# Altium PCB WallDigitalClock.PcbDoc
Units mm, origin at the board's own origin, x right, y up, seen from the top; angles counter-clockwise.
Board outline 214 x 90 mm, 2 copper layers (Top Layer, Bottom Layer); 68 components, 59 nets, 243 pads, 27 vias.
Unrouted connection lines stored in the file: 71.
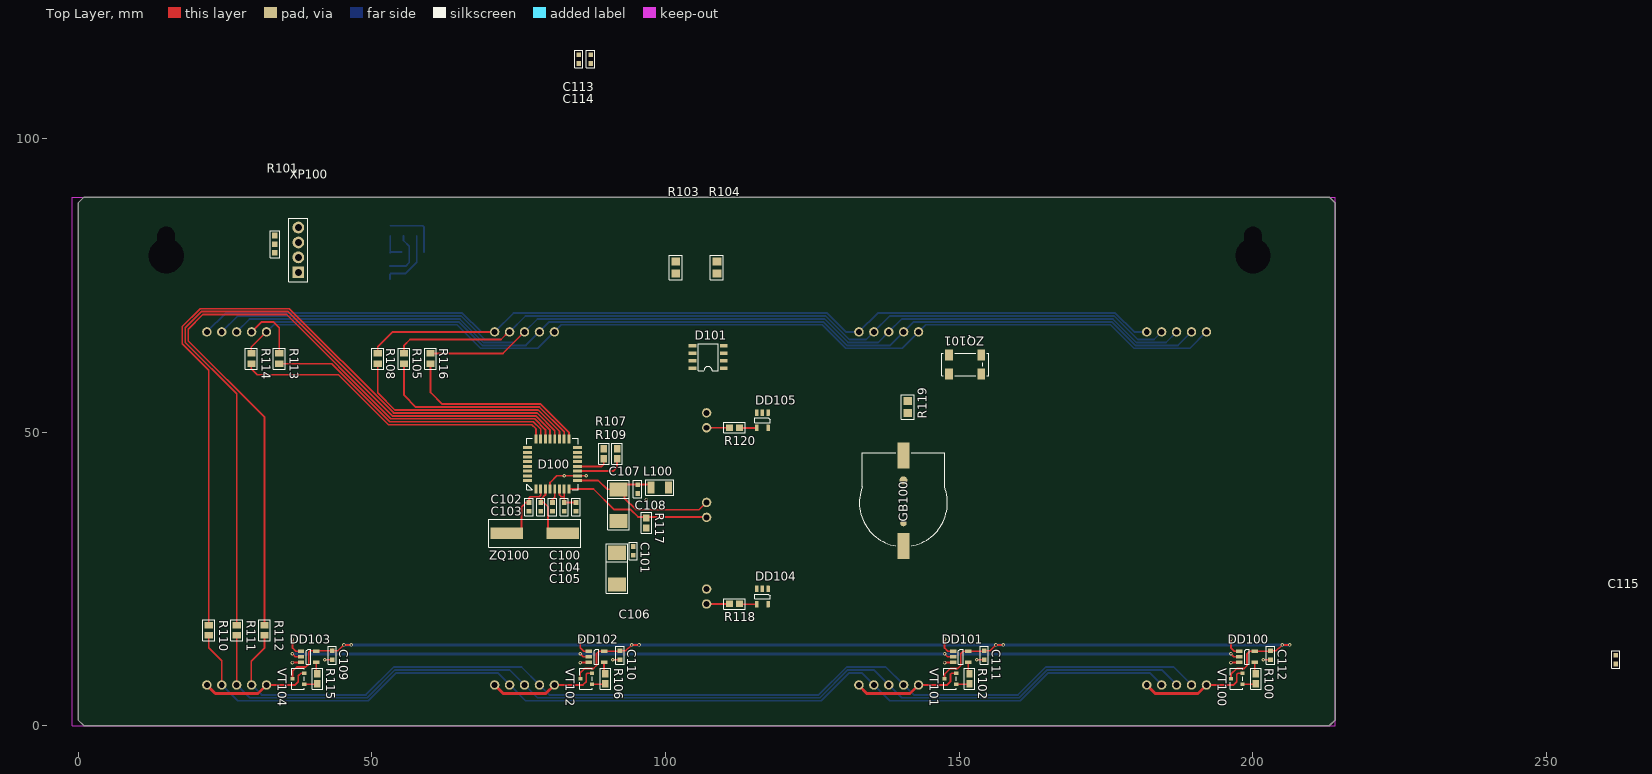
[diagram p0: Top Layer view]
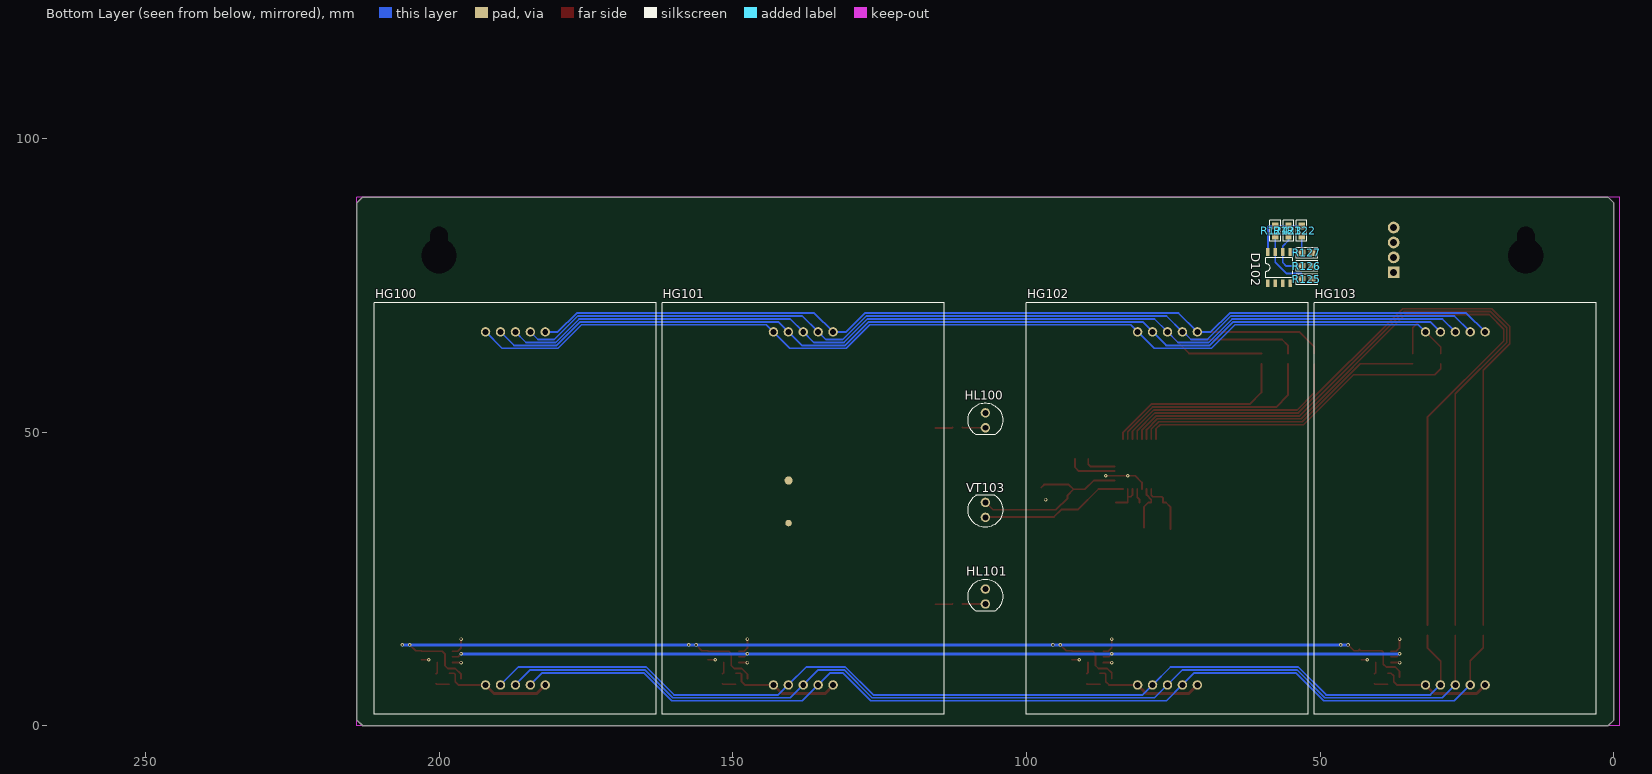
[diagram p1: Bottom Layer view, seen from below]

## Layer stack, top to bottom
Top Solder: solder mask 0.0102, Solder Resist, Dk 3.5
Top Layer: signal copper 0.0356
Dielectric 1: dielectric 0.32, FR-4, Dk 4.8
Bottom Layer: signal copper 0.0356
Bottom Solder: solder mask 0.0102, Solder Resist, Dk 3.5

## Board outline
1,0 213,0 214,1 214,89 213,90 1,90 0,89 0,1

## Design rules (kind name [scope] priority, off if disabled: settings)
Clearance [All] p1: gap=0.2 ignorepadtopadclearanceinfootprint=TRUE
PolygonConnect [All] p1: connectstyle=Relief reliefconductorwidth=0.254 reliefentries=4 polygonreliefangle="90 Angle" airgapwidth=0.254
RoutingVias [All] p1: holewidth=0.3 width=0.6 viastyle="Through Hole" minholewidth=0.3 minwidth=0.6 maxholewidth=0.4 maxwidth=0.8
SolderMaskExpansion [All] p1: expansion=0.102
Width [All] p1: maxlimit=0.8 minlimit=0.2 preferedwidth=0.5
30 further rules are at their usual default settings.

## Components (designator, comment, footprint, x,y, rotation, side; value= is the part's Value field where it differs from the comment)
C100 "Capacitor" CAP0603RS 80.75,37.25 r270 top value=1uF
C101 "Capacitor" CAP0603RS 94.5,29.75 r270 top value=0.1uF
C102 "Capacitor" CAP0603RS 78.75,37.25 r270 top value=12pF
C103 "Capacitor" CAP0603RS 76.75,37.25 r270 top value=12pF
C104 "Capacitor" CAP0603RS 82.75,37.25 r270 top value=0.1uF
C105 "Capacitor" CAP0603RS 84.75,37.25 r270 top value=0.1uF
C106 "Capacitor_Pol" Type-C 91.75,26.75 r270 top value=10uFx10V
C107 "Capacitor_Pol" Type-C 92,37.55 r270 top value=10uFx10V
C108 "Capacitor" CAP0603RS 95.25,40.3 r270 top locked value=0.1uF
C109 "Capacitor" CAP0603RS 43.25,12 r270 top value=0.1uF
C110 "Capacitor" CAP0603RS 92.25,12 r270 top value=0.1uF
C111 "Capacitor" CAP0603RS 154.25,12 r270 top value=0.1uF
C112 "Capacitor" CAP0603RS 203,12 r270 top value=0.1uF
C113 "Capacitor" CAP0603RS 85.25,113.5 r270 top value=0.1uF
C114 "Capacitor" CAP0603RS 87.25,113.5 r270 top value=0.1uF
C115 "Capacitor" CAP0603RS 261.75,11.25 r90 top value=0.1uF
D100 "STM8S105K4T6C" LQFP32 80.75,44.55 r90 top
D101 "DS1307" SO8 107.25,62.75 r180 top
D102 "LM75A" SO8 57,78 r90 bottom
DD100 "SN74LVC1G08" SOT23-5 199,11.75 r0 top value=SN74LVC1G08DVBR
DD101 "SN74LVC1G08" SOT23-5 150.25,11.75 r0 top value=SN74LVC1G08DVBR
DD102 "SN74LVC1G08" SOT23-5 88.25,11.75 r0 top value=SN74LVC1G08DVBR
DD103 "SN74LVC1G08" SOT23-5 39.25,11.75 r0 top value=SN74LVC1G08DVBR
DD104 "SN74LVC1G08" SOT23-5 116.5,22 r270 top value=SN74LVC1G08DVBR
DD105 "SN74LVC1G08" SOT23-5 116.5,52 r270 top value=SN74LVC1G08DVBR
GB100 "*" CR1220_HOLDER 140.5,38 r90 top value=CR1220
HG100 "SA23-11" SA23-11 187,37 r180 bottom locked value=SA23-11GWA (schematic designator HG1)
HG101 "SA23-11" SA23-11 138,37 r180 bottom locked value=SA23-11GWA (schematic designator HG2)
HG102 "SA23-11" SA23-11 76,37 r180 bottom locked value=SA23-11GWA (schematic designator HG3)
HG103 "SA23-11" SA23-11 27,37 r180 bottom locked value=SA23-11GWA (schematic designator HG4)
HL100 "Green" LED_5mm_Green 107,52 r270 bottom locked value=L-1503GT (schematic designator HL1)
HL101 "Green" LED_5mm_Green 107,22 r270 bottom locked value=L-1503GT (schematic designator HL2)
L100 "Inductor" IND1210 99,40.55 r180 top value=CM322522-100KL
R100 "Resistor" RES0603WS 200.5,8 r270 top value=1k
R101 "Res_JMP" RES0603JMP-RS 33.5,82 r90 top value=10k
R102 "Resistor" RES0603WS 151.75,8 r270 top value=1k
R103 "Resistor" RES0805WS 101.75,78 r90 top value=4.7k
R104 "Resistor" RES0805WS 108.75,78 r90 top value=4.7k
R105 "Resistor" RES0805RS 55.5,62.5 r90 top value=10
R106 "Resistor" RES0603WS 89.75,8 r270 top value=1k
R107 "Resistor" RES0603WS 91.75,46.3 r270 top value=100
R108 "Resistor" RES0805RS 51,62.5 r90 top value=10
R109 "Resistor" RES0603WS 89.5,46.3 r270 top value=100
R110 "Resistor" RES0805RS 22.25,16.25 r270 top value=10
R111 "Resistor" RES0805RS 27,16.25 r270 top value=10
R112 "Resistor" RES0805RS 31.75,16.25 r270 top value=10
R113 "Resistor" RES0805RS 34.25,62.5 r90 top value=10
R114 "Resistor" RES0805RS 29.5,62.5 r90 top value=10
R115 "Resistor" RES0603WS 40.75,8 r270 top value=1k
R116 "Resistor" RES0805RS 60,62.5 r90 top value=10
R117 "Resistor" RES0603WS 96.75,34.55 r270 top value=10k
R118 "Resistor" RES0603WS 111.75,20.75 r180 top value=10
R119 "Resistor" RES0805WS 141.25,54.25 r270 top value=10k
R120 "Resistor" RES0603WS 111.75,50.75 r180 top value=10
R122 "Resistor" RES0603WS 53.15,84.25 r270 bottom value=10k
R123 "Resistor" RES0603WS 55.4,84.25 r270 bottom value=10k
R124 "Resistor" RES0603WS 57.65,84.25 r270 bottom value=10k
R125 "Resistor" RES0603WS 52.25,76 r180 bottom value=0
R126 "Resistor" RES0603WS 52.25,78.25 r180 bottom value=0
R127 "Resistor" RES0603WS 52.25,80.5 r180 bottom value=0
VT100 "NPN" SOT-23 197.25,8 r90 top value=BC817-25.215
VT101 "NPN" SOT-23 148.5,8 r90 top value=BC817-25.215
VT102 "NPN" SOT-23 86.5,8 r90 top value=BC817-25.215
VT103 "Photo_Transistor" LED_5mm_Clear 107,36.75 r90 bottom locked value=BPW85B
VT104 "NPN" SOT-23 37.5,8 r90 top value=BC817-25.215
XP100 "MaleConn_4_pin" PLS-4-2.54 37.5,81 r90 top value=PLS-4
ZQ100 "*" HC-49SM 77.75,32.75 r180 top value=12MHz
ZQ101 "*" KX-327S 151,61.5 r180 top value=32.768kHz

## Footprints (in the part's own frame and the unit in brackets; to place one, negate y for a bottom-side part, rotate by r counter-clockwise, add the part's x,y. Pads: shape width x height; smd on the part's side, far side on the other; paste and mask are expansions set on the pad)
CAP0603RS [mm] "0603 Capacitor footprint"
  rect 0.8x0.8 smd: 1(-0.75,0) 2(0.75,0)
  silkscreen extent -1.5,-0.7 1.5,0.7, body extent -0.8,-0.4 0.8,0.4, height 0.6
CR1220_HOLDER [mm]
  rect 4.4x2 smd mask+0.102: 1(8,0) 2(-7.4,0)
  round 1.1 all layers, no hole mask+0: 4(-3.5,0)
  round 1.4 all layers, no hole mask+0: 5(3.75,0)
  silkscreen extent -7.39,-7.5 8.5,7.5, body extent -9.1,-7.4 9.7,7.35, height 4.28
HC-49SM [mm] "HC-49/SM Package"
  rect 5.5x2 smd: 1(-4.75,0) 2(4.75,0)
  silkscreen extent -7.8,-2.4 7.8,2.4, body extent -6.4,-2.41 6.4,2.42, height 4.35
IND1210 [mm] "1210 CM322522 Package"
  rect 1.2x2 smd: 1(-1.5,0) 2(1.5,0)
  silkscreen extent -2.4,-1.3 2.4,1.3, body extent -1.68,-1.25 1.68,1.25, height 2.3
KX-327S [mm] "KX-327, 4 pin"
  rect 1.3x1.9 smd: 1(-2.75,-1.6) 2(2.75,-1.6) 3(2.75,1.6) 4(-2.75,1.6)
  silkscreen extent -4,-1.9 4,1.9, body extent -4,-1.85 4,1.85, height 2.55
LED_5mm_Clear [mm] "Single LED, Pinch 2.54mm, Size 5mm"
  round 1.6 hole 1: 1(-1.27,0) 2(1.27,0)
  silkscreen extent -2.95,-2.95 2.5,2.95, body extent -2.98,-3.01 2.44,3.01, height 12.31
LED_5mm_Green [mm] "Single LED, Pinch 2.54mm, Size 5mm"
  round 1.6 hole 1: 1(-1.27,0) 2(1.27,0)
  silkscreen extent -2.95,-2.95 2.5,2.95, body extent -2.98,-3.01 2.44,3.01, height 12.31
LQFP32 [mm] "LQFP32 Package, Pitch 0.8mm, 32 Lead"
  rect 1.5x0.5 smd: 1(-4.25,2.8) 2(-4.25,2) 3(-4.25,1.2) 4(-4.25,0.4) 5(-4.25,-0.4) 6(-4.25,-1.2) 7(-4.25,-2) 8(-4.25,-2.8) 17(4.25,-2.8) 18(4.25,-2) 19(4.25,-1.2) 20(4.25,-0.4) 21(4.25,0.4) 22(4.25,1.2) 23(4.25,2) 24(4.25,2.8)
  rect 0.5x1.5 smd: 9(-2.8,-4.25) 10(-2,-4.25) 11(-1.2,-4.25) 12(-0.4,-4.25) 13(0.4,-4.25) 14(1.2,-4.25) 15(2,-4.25) 16(2.8,-4.25) 25(2.8,4.25) 26(2,4.25) 27(1.2,4.25) 28(0.4,4.25) 29(-0.4,4.25) 30(-1.2,4.25) 31(-2,4.25) 32(-2.8,4.25)
  silkscreen extent -4.4,-4.4 4.4,4.4, body extent -4.5,-4.5 4.5,4.5, height 1.68
PLS-4-2.54 [mm] "PLS Connector, 4 pin, Pitch 2.54mm (0.1inch)"
  rect 2x2 hole 1.2: 1(-3.81,0)
  round 2 hole 1.2: 2(-1.27,0) 3(1.27,0) 4(3.81,0)
  silkscreen extent -5.4,-1.6 5.4,1.6, body extent -5.08,-1.27 5.08,1.27, height 8.59
RES0603JMP-RS [mm] "Resistor Jumper, 0603 Package, Reflow Soldering"
  rect 0.95x0.95 smd: 1(-1.45,0) 2(0,0) 3(1.45,0)
  silkscreen extent -2.3,-0.8 2.3,0.8, body extent -1.52,-0.43 0.08,0.43, height 0.48
RES0603WS [mm] "Resistor 0603 Wave Soldering"
  rect 1.2x1.1 smd: 1(-0.85,0) 2(0.85,0)
  silkscreen extent -1.8,-0.9 1.8,0.9, body extent -0.8,-0.43 0.8,0.43, height 0.48
RES0805RS [mm] "Resistor 0805 Reflow Soldering"
  rect 1.1x1.4 smd: 1(-0.875,0) 2(0.875,0)
  silkscreen extent -1.8,-1 1.8,1, body extent -1,-0.63 1,0.63, height 0.48
RES0805WS [mm] "Resistor 0805 Wave Soldering"
  rect 1.4x1.5 smd: 1(-1.025,0) 2(1.025,0)
  silkscreen extent -2.1,-1.1 2.1,1.1, body extent -1,-0.63 1,0.63, height 0.48
SA23-11 [mm] "7-Segment Display, 57mm (2.3 inch)"
  round 1.6 hole 1: 1(-5.08,-30.05) 2(-2.54,-30.05) 3(0,-30.05) 4(2.54,-30.05) 5(5.08,-30.05) 6(5.08,30.05) 7(2.54,30.05) 8(0,30.05) 9(-2.54,30.05) 10(-5.08,30.05)
  silkscreen extent -24,-35 24,35, body extent -24,-35 24,35, height 12
SO8 [mm] "SOT96-1 Package, 8 pin, Pitch 1.27mm"
  rect 1.3x0.6 smd: 1(-2.65,1.905) 2(-2.65,0.635) 3(-2.65,-0.635) 4(-2.65,-1.905) 5(2.65,-1.905) 6(2.65,-0.635) 7(2.65,0.635) 8(2.65,1.905)
  silkscreen extent -1.7,-2.3 1.7,2.3, body extent -2.9,-2.45 2.88,2.45, height 1.45
SOT23-5 [mm] "SOT23, 5 pins"
  rrect15% 1.1x0.6 smd: 1(-1.3,0.95) 2(-1.3,0) 3(-1.3,-0.95) 4(1.3,-0.95) 5(1.3,0.95)
  silkscreen extent -0.4,-1.3 0.4,1.3, body extent -1.4,-1.45 1.4,1.45, height 1.46
SOT-23 [mm]
  rect 0.6x0.7 smd: 1(-0.95,-1) 2(0.95,-1) 3(0,1)
  silkscreen extent -1.8,-1 1.8,1.1, body extent -1.5,-1.25 1.5,1.25, height 1.15
Type-C [mm] "6032-28 (Type-C) Package, Tantalum Capacitor"
  rect 2.4x3 smd: 1(-2.7,0) 2(2.7,0)
  silkscreen extent -4.2,-1.8 4.2,1.8, body extent -3.15,-1.75 3.15,1.75, height 2.85

## Part data
C106 C107 VT103: Manufacturer=Vishay
  C106 C107: HelpURL=https://www.vishay.com/docs/40002/293d.pdf
  VT103: HelpURL=https://static.chipdip.ru/lib/052/DOC000052462.pdf
D100: "MCU 8bit, STM8 CISC, Package LQFP-32", Manufacturer="ST Microelectronics", HelpURL=https://www.st.com/resource/en/datasheet/stm8s105k4.pdf
D101: "Real-time clock (RTC)", HelpURL=https://static.chipdip.ru/lib/041/DOC000041914.pdf
D102: "Digital temperature sensor and thermal watchdog", HelpURL=https://static.chipdip.ru/lib/301/DOC000301694.pdf
DD100 DD101 DD102 DD103 DD104 DD105: "Single 2-Input Positive-AND Gate", Manufacturer="Texas Instruments", HelpURL=http://www.ti.com/lit/ds/symlink/sn74lvc1g08.pdf
GB100: library part Single_Battety, "Holder for single battery"
HG100 HG101 HG102 HG103: "Single Digit Numeric Display 57mm (2.3INCH), Common Anode", Manufacturer=Kingbright, HelpURL=https://www.chipdip.ru/product/sa23-11gwa?from=visited_product
HL100 HL101: library part LED
L100: Manufacturer=Bourns, HelpURL=https://www.bourns.com/docs/Product-Datasheets/cm322522.pdf
R101: "Jumper two way on resistor"
ZQ100 ZQ101: library part Crystal_Oscillator

## Free pads (board coordinates)
  round 0 hole 6 unplated: 0(15,80) 0(200,80)
  round 0 hole 3 slot 6 at 90 deg unplated: 0(15,82) 0(200,82)

## Via types
v1: diameter 0.6, hole 0.3, Top Layer to Bottom Layer, 27 vias

## Nets (pads, with @x,y where several pads share a name; then routed paths per layer and width w, separated by ;. In a path a pad name is that pad's centre, name@x,y a point inside that pad or via, vN(x,y) a via of type N, cw(c..) or ccw(c..) an arc to the next point about the centre after c; other vN are vias at no path point)
DIG.1: HG100.1 HG100.5 VT100.2 | length 19.1
  Top Layer w0.3: HG100.1 196.7,6.95 197.25,7.5 197.25,8.75 197.45,8.95 VT100.2
  Top Layer w0.5: HG100.5 183.37,5.5 190.63,5.5 HG100.1
DIG.2: HG101.1 HG101.5 VT101.2 | length 19.4
  Top Layer w0.3: HG101.1 147.95,6.95 148.5,7.5 148.5,8.75 148.7,8.95 VT101.2
  Top Layer w0.5: HG101.5 132.92,6.83 134.25,5.5 141.63,5.5 HG101.1
DIG.3: HG102.1 HG102.5 VT102.2 | length 19.3
  Top Layer w0.3: HG102.1 85.95,6.95 86.5,7.5 86.5,8.75 86.7,8.95 VT102.2
  Top Layer w0.5: HG102.5 72.37,5.5 79.63,5.5 HG102.1
DIG.4: HG103.1 HG103.5 VT104.2 | length 19.2
  Top Layer w0.3: HG103.1 36.95,6.95 37.5,7.5 37.5,8.5 37.95,8.95 VT104.2
  Top Layer w0.5: HG103.5 23.37,5.5 30.63,5.5 HG103.1
DIGIN.1: D100.16 DD100.1 | length 3.2
  Top Layer w0.3: v1(196.25,14.75) 196.25,13.25 196.8,12.7 DD100.1
DIGIN.2: D100.15 DD101.1 | length 3.2
  Top Layer w0.3: v1(147.5,14.75) 147.5,13.25 148.05,12.7 DD101.1
DIGIN.3: D100.14 DD102.1 | length 3.2
  Top Layer w0.3: v1(85.5,14.75) 85.5,13.25 86.05,12.7 DD102.1
DIGIN.4: D100.13 DD103.1 | length 3.2
  Top Layer w0.3: v1(36.5,14.75) 36.5,13.25 37.05,12.7 DD103.1
DOT.A: HL101.2 R118.2 | length 3.9
  Top Layer w0.3: HL101.2 110.88,20.73 R118.2
DOT.B: HL100.2 R120.2 | length 3.9
  Top Layer w0.3: HL100.2 110.88,50.73 R120.2
DOTIN.A: DD104.1
DOTIN.B: DD105.1
DP: HG100.8 HG101.8 HG102.8 HG103.8 R116.2 | length 187.5
  Top Layer w0.3: R116.2 72.325,63.375 HG102.8
  Bottom Layer w0.3: HG103.8 29.2,69.25 65,69.25 69,65.25 74.2,65.25 HG102.8 78.2,69.25 127.086,69.25 131.086,65.25 136.2,65.25 HG101.8 140.2,69.25 176.164,69.25 180.164,65.25 185.2,65.25 HG100.8
GND: C100.2 C101.2 C102.2 C103.2 C104.2 C105.2 C106.2 C107.2 C108.2 C109.2 C110.2 C111.2 C112.2 C113.2 C114.2 C115.2 D100.4 D100.10 D101.4 D102.4 DD100.3 DD101.3 DD102.3 DD103.3 DD104.3 DD105.3 GB100.2 HL100.1 HL101.1 R101.3 R117.2 R125.2 R126.2 R127.2 XP100.4 | length 18.4
  Top Layer w0.3: v1(36.5,10.75) 37.9,10.75 DD103.3 ; v1(42,11.25) C109.2@43,11.25 ; D100.4 80.35,41.4 81.5,42.55 v1(82.75,42.55) D100.10 v1(86.5,42.55) ; v1(85.5,10.75) 86.9,10.75 DD102.3 ; v1(91,11.25) C110.2 ; v1(147.5,10.75) 148.9,10.75 DD101.3 ; v1(153,11.25) C111.2 ; v1(196.25,10.75) 197.65,10.75 DD100.3 ; v1(201.75,11.25) C112.2
  other v1: 96.75,38.5
NetD100_11: D100.11 R107.2 | length 8.5
  Top Layer w0.3: D100.11 91.1,43.35 91.75,44 R107.2
NetD100_12: D100.12 R109.2 | length 5.6
  Top Layer w0.3: D100.12 89.15,44.15 89.5,44.5 R109.2
NetD100_17: D100.17 R116.1 | length 32.4
  Top Layer w0.3: R116.1 60,56.75 62,54.75 78.75,54.75 83.55,49.95 D100.17
NetD100_18: D100.18 R105.1 | length 36.4
  Top Layer w0.3: R105.1 55.5,56.25 57.5,54.25 78.543,54.25 82.75,50.043 D100.18
NetD100_19: D100.19 R108.1 | length 40
  Top Layer w0.3: R108.1 51,56.664 53.914,53.75 78.336,53.75 81.95,50.136 D100.19
NetD100_20: D100.20 R110.1 | length 127.4
  Top Layer w0.3: R110.1 22.25,60.543 17.75,65.043 17.75,67.957 20.793,71 35.957,71 53.707,53.25 78.129,53.25 81.15,50.229 D100.20
NetD100_21: D100.21 R111.1 | length 127.4
  Top Layer w0.3: R111.1 27,56.5 18.25,65.25 18.25,67.75 21,70.5 35.75,70.5 39.25,67 53.5,52.75 77.922,52.75 80.35,50.322 D100.21
NetD100_22: D100.22 R112.1 | length 127.3
  Top Layer w0.3: R112.1 31.75,52.5 18.75,65.5 18.75,67.5 21.25,70 35.5,70 53.25,52.25 77.714,52.25 79.55,50.414 D100.22
NetD100_23: D100.23 R113.1 | length 50.8
  Top Layer w0.3: R113.1 43.168,61.625 53.043,51.75 77.507,51.75 78.75,50.507 D100.23
NetD100_24: D100.24 R114.1 | length 55.3
  Top Layer w0.3: R114.1 29.5,60.75 30.5,59.75 44.336,59.75 52.836,51.25 77.25,51.25 77.95,50.55 D100.24
NetD101_1: D101.1 ZQ101.1
NetD101_2: D101.2 ZQ101.4
NetD101_3: D101.3 GB100.1
NetD102_5: D102.5 R122.2 R127.1 | length 4.9
  Bottom Layer w0.3: R127.1 R127.1@53.15,80.55 ; R122.2 R127.1@53.15,80.55 ; D102.5 53.25,80.65 R127.1@53.15,80.55
NetD102_6: D102.6 R123.2 R126.1 | length 8.5
  Bottom Layer w0.3: R126.1 55.75,78.25 56.365,78.865 D102.6 56.365,81.635 55.4,82.6 R123.2
NetD102_7: D102.7 R124.2 R125.1 | length 10.7
  Bottom Layer w0.3: R125.1 53.1,76.85 53.25,77 55.75,77 57.635,78.885 D102.7 57.65,80.665 R124.2
NetDD100_4: DD100.4 R100.1 | length 2
  Top Layer w0.3: DD100.4 200.3,9.05 R100.1
NetDD101_4: DD101.4 R102.1 | length 2
  Top Layer w0.3: DD101.4 151.55,9.05 R102.1
NetDD102_4: DD102.4 R106.1 | length 2
  Top Layer w0.3: DD102.4 89.55,9.05 R106.1
NetDD103_4: DD103.4 R115.1 | length 2
  Top Layer w0.3: DD103.4 40.55,9.05 R115.1
NetDD104_4: DD104.4 R118.1 | length 3
  Top Layer w0.3: R118.1 112.65,20.7 DD104.4
NetDD105_4: DD105.4 R120.1 | length 3
  Top Layer w0.3: R120.1 112.65,50.7 DD105.4
NetR100_2: R100.2 VT100.1 | length 2.3
  Top Layer w0.3: VT100.1 200.4,7.05 R100.2
NetR102_2: R102.2 VT101.1 | length 2.3
  Top Layer w0.3: VT101.1 151.65,7.05 R102.2
NetR106_2: R106.2 VT102.1 | length 2.3
  Top Layer w0.3: VT102.1 89.65,7.05 R106.2
NetR115_2: R115.2 VT104.1 | length 2.3
  Top Layer w0.3: VT104.1 40.65,7.05 R115.2
NRST: D100.1 R101.2 XP100.2
OSCIN: C103.1 D100.2 ZQ100.2 | length 9.3
  Top Layer w0.3: ZQ100.2@75.5,33.5 75.5,37.25 76.25,38 C103.1 76.75,38.75 77,39 78.5,39 78.75,39.25 D100.2
OSCOUT: C102.1 D100.3 ZQ100.1 | length 7.7
  Top Layer w0.3: D100.3 79.55,39.3 78.75,38.5 C102.1 79.25,38 80,37.25 80,33.75
PHOTO: C101.1 D100.8 R117.1 VT103.1 | length 25.4
  Top Layer w0.3: D100.8 87.75,40.3 91.25,36.8 94.063,36.8 95.313,35.55 VT103.1@107,35.55
PWM: D100.27 DD100.2 DD101.2 DD102.2 DD103.2 DD104.2 DD105.2 | length 166.4
  Top Layer w0.3: v1(36.5,12.25) 37,11.75 DD103.2 ; v1(85.5,12.25) 86,11.75 DD102.2 ; v1(147.5,12.25) 148,11.75 DD101.2 ; v1(196.25,12.25) 196.75,11.75 DD100.2
  Bottom Layer w0.5: v1(36.5,12.25) v1(85.5,12.25) v1(147.5,12.25) v1(196.25,12.25)
SCL: D101.6 D102.2 R104.2 R109.1
SDA: D101.5 D102.1 R103.2 R107.1
SEG.A: HG100.7 HG101.7 HG102.7 HG103.7 R105.2 | length 190.2
  Top Layer w0.3: R105.2 55.5,64.75 56.5,65.75 72,65.75 73.3,67.05 HG102.7
  Bottom Layer w0.3: HG103.7 27.16,69.75 65.207,69.75 69.207,65.75 72,65.75 73.3,67.05 HG102.7 76.16,69.75 127.293,69.75 131.293,65.75 134.16,65.75 HG101.7 138.16,69.75 176.371,69.75 180.371,65.75 183.16,65.75 HG100.7
SEG.B: HG100.6 HG101.6 HG102.6 HG103.6 R108.2 | length 190.1
  Top Layer w0.3: R108.2 51,64.5 53.55,67.05 HG102.6
  Bottom Layer w0.3: HG103.6 25.12,70.25 65.414,70.25 68.614,67.05 HG102.6 74.12,70.25 127.5,70.25 130.7,67.05 HG101.6 136.12,70.25 176.578,70.25 179.778,67.05 HG100.6
SEG.C: HG100.4 HG101.4 HG102.4 HG103.4 R110.2 | length 181.1
  Top Layer w0.3: R110.2 22.25,13.25 24.46,11.04 HG103.4
  Bottom Layer w0.3: HG103.4 27.16,4.25 49.414,4.25 54.164,9 71.41,9 HG102.4 76.16,4.25 126.5,4.25 131.25,9 133.41,9 HG101.4 138.16,4.25 160.414,4.25 165.164,9 182.41,9 HG100.4
SEG.D: HG100.3 HG101.3 HG102.3 HG103.3 R111.2 | length 180.2
  Top Layer w0.3: HG103.3 R111.2
  Bottom Layer w0.3: HG103.3 29.2,4.75 49.207,4.75 53.957,9.5 73.45,9.5 HG102.3 78.2,4.75 126.293,4.75 131.043,9.5 135.45,9.5 HG101.3 140.2,4.75 160.207,4.75 164.957,9.5 184.45,9.5 HG100.3
SEG.E: HG100.2 HG101.2 HG102.2 HG103.2 R112.2 | length 181.2
  Top Layer w0.3: HG103.2 29.5,6.99 29.5,11 31.75,13.25 R112.2
  Bottom Layer w0.3: HG103.2 31.24,5.25 49,5.25 53.75,10 75.49,10 HG102.2 80.24,5.25 126.086,5.25 130.836,10 137.49,10 HG101.2 142.24,5.25 160,5.25 164.75,10 186.49,10 HG100.2
SEG.F: HG100.9 HG101.9 HG102.9 HG103.9 R113.2 | length 180.1
  Top Layer w0.3: HG103.9 31.24,68.75 33.25,68.75 34.25,67.75 R113.2
  Bottom Layer w0.3: HG103.9 31.24,68.75 64.793,68.75 68.793,64.75 76.24,64.75 HG102.9 80.24,68.75 126.879,68.75 130.879,64.75 138.24,64.75 HG101.9 142.24,68.75 175.957,68.75 179.957,64.75 187.24,64.75 HG100.9
SEG.G: HG100.10 HG101.10 HG102.10 HG103.10 R114.2 | length 174.7
  Top Layer w0.3: R114.2 29.5,64.47 HG103.10
  Bottom Layer w0.3: HG103.10 33.28,68.25 64.5,68.25 68.5,64.25 78.28,64.25 HG102.10 82.28,68.25 126.672,68.25 130.672,64.25 140.28,64.25 HG101.10 144.28,68.25 175.75,68.25 179.75,64.25 189.28,64.25 HG100.10
SQW: D100.32 D101.7 R119.2
SWIM: D100.26 XP100.3
VCAP: C100.1 D100.5 | length 2.5
  Top Layer w0.3: C100.1 80.75,38.5 81.15,38.9 D100.5
VCC: C104.1 C105.1 C106.1 C109.1 C110.1 C111.1 C112.1 C113.1 C114.1 C115.1 D100.6 D100.7 D101.8 D102.8 DD100.5 DD101.5 DD102.5 DD103.5 DD104.5 DD105.5 L100.1 R101.1 R103.1 R104.1 R119.1 R122.1 R123.1 R124.1 VT100.3 VT101.3 VT102.3 VT104.3 XP100.1 | length 233.5
  Top Layer w0.3: VT104.3@36.5,8.25 36.5,9.25 37.25,10 38.75,10 39.25,10.5 39.25,12.5 39.5,12.75 C109.1 ; C109.1@43.25,13 43.5,12.75 44.25,12.75 v1(45.25,13.75) v1(46.5,13.75) ; D100.6 81.95,39.3 82.25,39 82.75,39 ; D100.7 82.75,39 ; C105.1 C104.1 82.75,39 ; VT102.3 85.5,9 86.25,9.75 87.75,9.75 88.25,10.25 88.25,12.25 88.7,12.7 DD102.5 92.2,12.7 C110.1 93.25,12.75 v1(94.25,13.75) v1(95.5,13.75) ; VT101.3 147.5,8.75 148.5,9.75 149.75,9.75 150.25,10.25 150.25,12.25 150.7,12.7 DD101.5 154.2,12.7 C111.1 155.25,12.75 v1(156.25,13.75) v1(157.5,13.75) ; VT100.3 196.25,8.75 197.25,9.75 198.5,9.75 199,10.25 199,12.25 199.45,12.7 DD100.5 202.95,12.7 C112.1 204,12.75 v1(205,13.75) v1(206.25,13.75)
  Bottom Layer w0.3: R122.1 R123.1 R124.1 58.65,85.1 58.905,84.845 D102.8
  Bottom Layer w0.5: v1(45.25,13.75) v1(46.5,13.75) v1(94.25,13.75) v1(95.5,13.75) v1(156.25,13.75) v1(157.5,13.75) v1(205,13.75) v1(206.25,13.75)
VCCA: C107.1 C108.1 D100.9 L100.2 VT103.2 | length 30.9
  Top Layer w0.3: D100.9 88.55,41.75 90.05,40.25 C107.1 ; L100.2 97,41.05 C108.1 92.8,41.05 C107.1 ; VT103.2@107,38.05 105.7,36.75 95,36.75 93,38.75 93,39.25 C107.1
pads on no net: D100.25 D100.28 D100.29 D100.30 D100.31 D102.3 GB100.4 GB100.5 ZQ101.2 ZQ101.3

## Keep-outs
Keep-Out Layer:
  lines w0.2: -1,0 214,0 214,90 -1,90 -1,0

## Dimensions
-1,90 to 214,90 on Size
-1,0 to -1,90 on Size